# Allegro board LAY-96099_A.brd
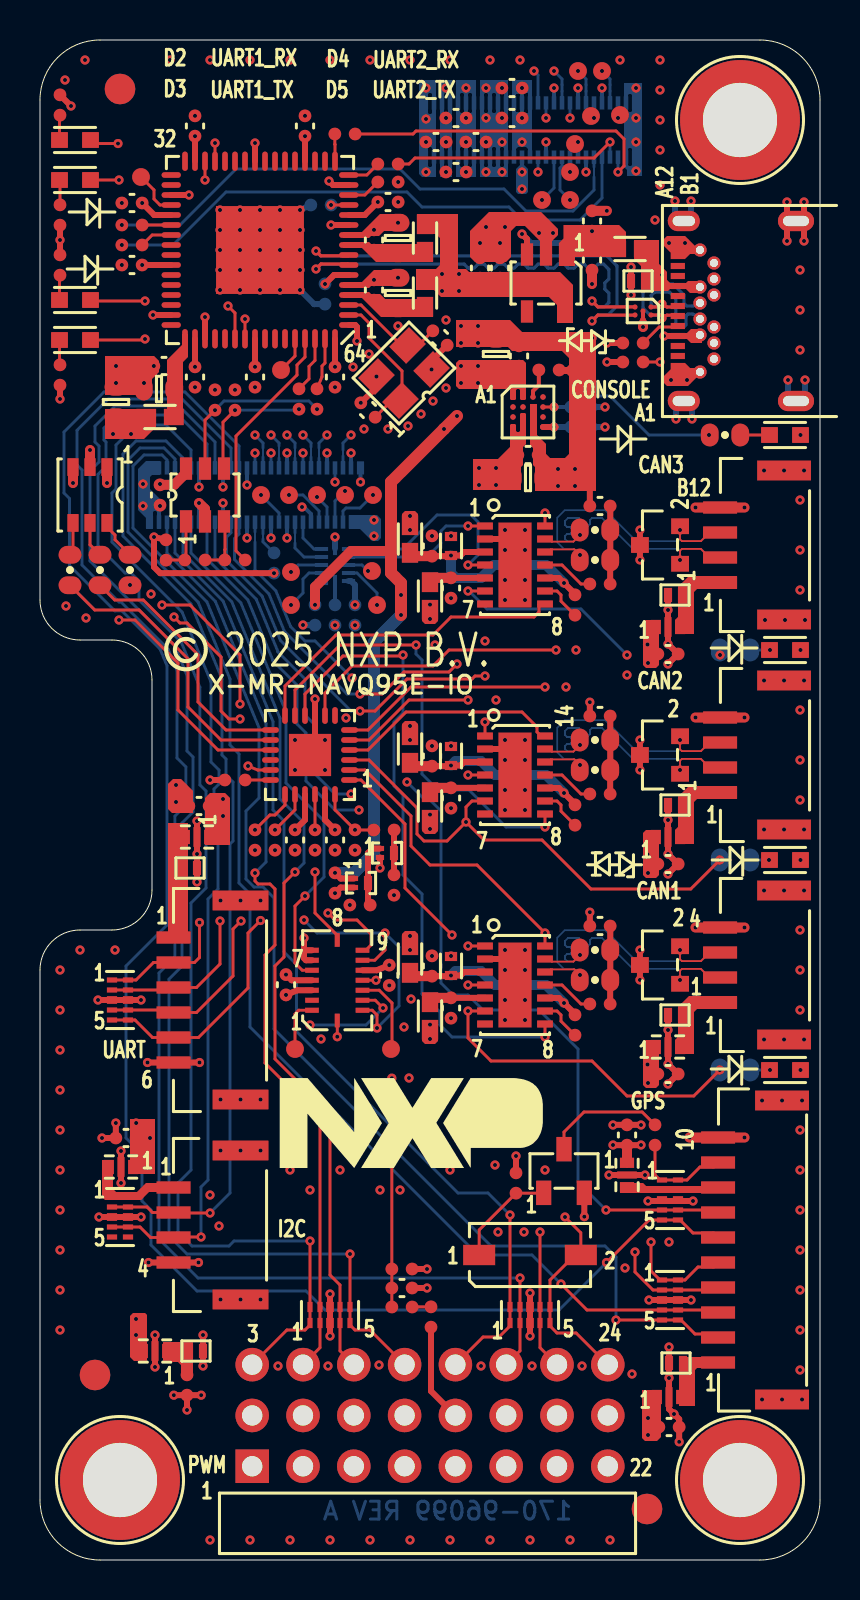
[diagram p0: board, top side]
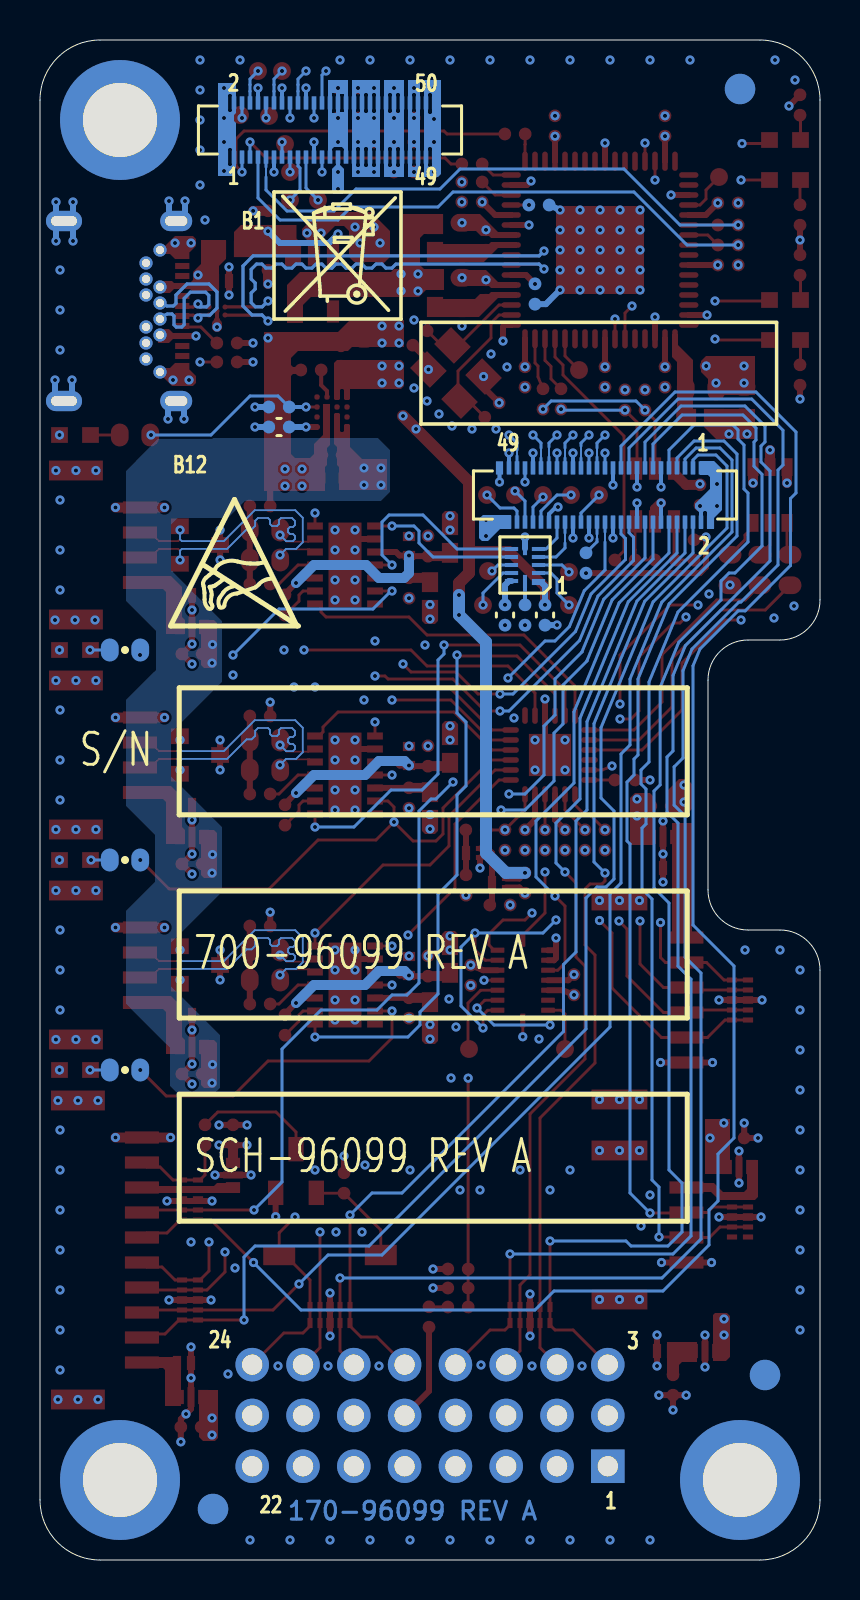
[diagram p1: board, bottom side, seen from below]

Outline 39 x 76 mm; copper layers: TOP, L2_GND1, L3_SIG1, L4_SIG2, L5_GND2, BOTTOM. Coordinates in mm from the lower left corner of the outline.
Outline path: 0,73 arc(0.88,75.12) 3,76 36,76 arc(38.12,75.12) 39,73 39,3 arc(38.12,0.88) 36,0 3,0 arc(0.88,0.88) 0,3 0,29.5 arc(0.59,30.91) 2,31.5 3.6,31.5 arc(5.01,32.09) 5.6,33.5 5.6,44 arc(5.01,45.41) 3.6,46 2,46 arc(0.59,46.59) 0,48 0,73

## Design rules (mm)
constraint set DEFAULT: min track width 0.145
net group CAN1_: nets CAN1_H CAN1_L
net group CAN2_: nets CAN2_H CAN2_L
net group CAN3_: nets CAN3_H CAN3_L
net group USB_CON_D: nets USB_CON_DM USB_CON_DP
net group USB_D: nets USB_DM USB_DP
net group CLK: nets CCM_CLKO2_FLEXIO1_IO27 CCM_CLKO3_CAN3_TX CCM_CLKO4_CAN3_RX DEBUG_TCLK_SWCLK EECLK GPIO15_SPI8_SCK SAI2_TX_BCLK
net group I2C: nets I2C4_SCL I2C4_SDA I3C1_SCL I3C1_SDA I3C2A_SCL I3C2A_SDA
net group POWER: nets CON_CAN1_5V0 CON_CAN2_5V0 CON_CAN3_5V0 FT_VPHY FT_VPLL N20053813 N20058865 N20059703 N20099573 N20163544 N20163589 VBUS VDD_CAN1_3V3 VDD_CAN1_5V0 VDD_CAN2_3V3 VDD_CAN2_5V0 VDD_CAN3_3V3 VDD_CAN3_5V0 VDD_CON_GPS_3V3 VDD_CON_GPS_5V0 VDD_CON_I2C_5V0 VDD_CON_UART_5V0 VDD_FT_1V8 VDD_SYS_1V8

## Placement (name value [footprint] x y rotation side)
BH1  MH3.7_6  [MH236-146P]  35 72 0 top
BH2  MH3.7_6  [MH236-146P]  35 4 0 top
BH3  MH3.7_6  [MH236-146P]  4 4 0 top
C1  0.047uF  [CC0402_25]  19.6 29.7 90 top
C2  0.047uF  [CC0402_25]  20.55 27.6 270 top
C4  1uF  [CC0402_TOL0P2]  20.55 29.7 90 top
C5  4700pF  [CC0402_25]  28 31.7 180 top
C6  0.047uF  [CC0402_25]  19.6 40.2 90 top
C7  0.047uF  [CC0402_25]  20.55 38.1 270 top
C9  1uF  [CC0402_TOL0P2]  20.55 40.2 90 top
C10  4700pF  [CC0402_25]  28 42.2 180 top
C11  0.047uF  [CC0402_25]  19.6 50.7 90 top
C12  0.047uF  [CC0402_25]  20.55 48.6 270 top
C14  1uF  [CC0402_TOL0P2]  20.55 50.7 90 top
C15  4700pF  [CC0402_25]  28 52.7 180 top
C16  0.1uF  [CC0402_25]  23.95 60.2 90 top
C17  1000pF  [CC0402_25]  27.05 56.65 0 bottom
C18  0.1uF  [CC0402_25]  17.46 29.24 270 top
C19  0.1uF  [CC0402_25]  12.3 28.76 90 top
C488  0.1uF  [CC0402_25]  16.7 63.5 90 top
C494  0.1uF  [CC0402_25]  27.6 65 270 top
C496  0.1uF  [CC0402_25]  23 64.6 90 top
C497  0.1uF  [CC0402_25]  7.75 59.15 270 top
C498  0.1uF  [CC0402_25]  4.6 64.75 180 top
C499  0.1uF  [CC0402_25]  10.75 59.15 270 top
C500  0.1uF  [CC0402_25]  13.25 71.7 90 top
C501  0.1uF  [CC0402_25]  6.2 59.7 180 top
C502  0.1uF  [CC0402_25]  17.4 67.9 0 top
C503  0.1uF  [CC0402_25]  14.75 59.15 270 top
C504  27pF  [CC0402_25]  16.4 57.5 135 top
C505  27pF  [CC0402_25]  20 61.1 315 top
C506  0.1uF  [CC0402_25]  7.75 71.7 90 top
C507  4.7uF  [CC0603_OV]  17.9 63.35 90 top
C508  4.7uF  [CC0603_OV]  17.9 66.1 90 top
C509  0.1uF  [CC0402_25]  16.7 66 90 top
C510  0.1uF  [CC0402_25]  4.6 67.85 180 top
C511  4.7uF  [CC0603_OV]  5.95 58.55 180 top
C512  4.7uF  [CC0603_OV]  3.8 57.9 90 top
C513  0.1uF  [CC0402_25]  6 53.25 270 top
C514  0.1uF  [CC0402_25]  12.75 36 270 top
C515  0.1uF  [CC0402_25]  14.75 36 270 top
C516  0.1uF  [CC0402_25]  31.45 6.65 0 top
C517  0.1uF  [CC0402_25]  29.35 21.25 90 top
C518  0.1uF  [CC0402_25]  7.95 37.7 180 top
C519  0.1uF  [CC0402_25]  4.3 21.1 180 top
C520  0.1uF  [CC0402_25]  31.4 45.3 0 top
C521  0.1uF  [CC0402_25]  31.4 34.8 0 top
C522  0.1uF  [CC0402_25]  31.4 24.3 0 top
C523  10uF  [CC0603_OV]  24.4 54.1 0 top
C524  0.1uF  [CC0402_25]  24.4 55.25 0 top
C526  10uF  [CC0603_OV]  22.8 60.3 90 top
C527  0.1uF  [CC0402_25]  19.8 70.9 180 top
C528  0.1uF  [CC0402_25]  23.6 72.1 0 top
C529  1uF  [CC0402_25]  22 64.6 90 top
C530  1uF  [CC0402_25]  27.6 66.95 90 top
C531  1uF  [CC0402_25]  20.8 69.4 0 top
C532  1uF  [CC0402_25]  21.8 70.9 180 top
C533  0.1uF  [CC0402_25]  20.8 72.1 0 top
C534  0.1uF  [CC0402_25]  23.6 73.6 0 top
C535  0.1uF  [CC0402_25]  15.75 47.25 270 bottom
C536  0.1uF  [CC0402_25]  13.75 47.25 270 bottom
C537  0.1uF  [CC0402_25]  18.1 13.6 0 top
D1  PESD5V0F1BL  [SOD882]  29.9 63.95 0 top
D2  LED_ORANGE  [LED_0603_11MIL]  1.75 71 0 top
D3  LED GREEN  [LED_0603]  1.75 69 0 top
D4  LED_ORANGE  [LED_0603_11MIL]  1.75 63 0 top
D5  LED GREEN  [LED_0603]  1.75 61 0 top
D7  ESD7104  [UDFN10_2P5X1]  31.5 13 0 top
D10  ESD7104  [UDFN10_2P5X1]  4 28 0 top
D26  PESD5V0F1BL  [SOD882]  31.8 9.85 0 top
D27  PESD5V0F1BL  [SOD882]  7.5 34.6 180 top
D31  PESD5V0F1BL  [SOD882]  7.8 10.45 180 top
D32  PESD5V0F1BL  [SOD882]  31.75 48.25 0 top
D33  PESD5V0F1BL  [SOD882]  31.75 37.75 0 top
D34  PESD5V0F1BL  [SOD882]  31.75 27.25 0 top
D35  ESD7104  [UDFN10_2P5X1]  14.5 12.25 90 top
D36  ESD7104  [UDFN10_2P5X1]  24.5 12.25 90 top
D37  ESD7104  [UDFN10_2P5X1]  31.5 18 0 top
D38  ESD7104  [UDFN10_2P5X1]  4 17.15 0 top
D39  LED_SUPER_RED  [LED_0603]  37.25 56.25 0 top
D41  LED_GRN  [LED_0603]  37.25 35 0 top
D42  LED_GRN  [LED_0603]  37.25 45.5 0 top
D43  LED_GRN  [LED_0603]  37.25 24.5 0 top
FL4  0.1uF  [CC_FIL_0402]  5.75 10.45 180 top
FL5  0.1uF  [CC_FIL_0402]  31.45 8.15 0 top
FL6  0.1uF  [CC_FIL_0402]  29.35 19.25 270 top
FL7  0.1uF  [CC_FIL_0402]  7.85 36.15 180 top
FL8  0.1uF  [CC_FIL_0402]  4.05 19.65 180 top
FL9  0.1uF  [CC_FIL_0402]  31.4 46.65 0 top
FL10  0.1uF  [CC_FIL_0402]  31.4 36.15 0 top
FL11  0.1uF  [CC_FIL_0402]  31.4 25.65 0 top
J1  CON 2X25  [CON_RCPT_2X25_0P4MM_SM]  24.5 71.5 180 bottom
J2  CON 2X25  [CON_RCPT_2X25_0P4MM_SM]  10.75 53.25 0 bottom
J4  CON_1X4  [CON_1X4_1P25_8P25X4P25_SM_RA]  36.25 29.75 90 top
J8  CON_1X4  [CON_1X4_1P25_8P25X4P25_SM_RA]  36.25 40.25 90 top
J9  CON_1X4  [CON_1X4_1P25_8P25X4P25_SM_RA]  36.25 50.75 90 top
J10  23K2 0101#LCP-872-2LF-L22-S22  [CON24_USB_TYPEC_RA_SMT_TH_2P2L]  33 65.5 90 top
J12  HDR_3X8_RA  [HDR_3X8_2P54_TH_RA]  10.61 4.69 90 top
J13  CON_1X4  [CON_1X4_1P25_8P25X4P25_SM]  9 16.75 90 top
J14  CON_1X6  [CON_1X6_1P25_10P75X4P25_SM]  9 28 90 top
J22  CON 1X10 SM  [CON10_1P25_15P75X4P05_SM]  35.75 15.5 90 top
L1  BLM18KG121TZ1  [IND_0603]  18.5 30.05 270 top
L2  BLM18KG121TZ1  [IND_0603]  19.5 27.2 90 top
L3  BLM18KG121TZ1  [IND_0603]  18.5 40.55 270 top
L4  BLM18KG121TZ1  [IND_0603]  19.5 37.7 90 top
L5  BLM18KG121TZ1  [IND_0603]  18.5 51.05 270 top
L6  BLM18KG121TZ1  [IND_0603]  19.5 48.2 90 top
L53  120OHM@100MHZ  [IND_0603]  29.5 65.55 180 top
L54  120OHM@100MHZ  [IND_0603]  19.25 63.35 270 top
L55  120OHM@100MHZ  [IND_0603]  19.25 66.1 270 top
L56  120OHM@100MHZ  [IND_0603]  6 57.15 0 top
NOREF  -  []  29.6 3.17 90 top
NOREF#2  -  []  34 48.88 90 top
NOREF#3  -  []  29.6 0.5 0 top
NOREF#4  -  []  29.75 62.25 90 top
NOREF#5  -  []  46.6 46.6 90 top
NOREF#6  -  []  1.65 51.85 0 top
NOREF#7  -  []  25.85 4.69 0 top
NOREF#8  -  []  25.3 47.45 90 top
NOREF#9  -  []  33.7 60.05 90 top
NOREF#10  -  []  28.35 61.85 90 top
NOREF#11  -  []  33.7 64.05 90 top
NOREF#12  -  []  30.62 27.56 0 top
NOREF#13  -  []  34 40.88 90 top
NOREF#14  -  []  34 51.38 90 top
NOREF#15  -  []  6.68 17.38 90 top
NOREF#16  -  []  -494.52 -243.34 0 top
NOREF#17  -  []  34 31.62 90 top
NOREF#18  -  []  23.65 56.65 0 top
NOREF#19  -  []  38.3 46.6 0 top
NOREF#20  -  []  5.65 10.81 0 top
NOREF#21  -  []  37.8 57.95 90 top
NOREF#22  -  []  14.86 26.98 90 top
NOREF#23  -  []  30.79 46.65 0 top
NOREF#24  -  []  21.65 16.65 0 top
NOREF#25  -  []  38.15 7.62 0 top
NOREF#26  -  []  17 35.12 90 top
NOREF#27  -  []  15.65 48.7 90 top
NOREF#28  -  []  16.41 31.29 90 top
NOREF#29  -  []  30.13 7.79 0 top
NOREF#30  -  []  7.24 36.15 0 top
NOREF#31  -  []  8.46 36.51 0 top
NOREF#32  -  []  37.2 36.52 90 top
NOREF#33  -  []  5.47 54.6 0 top
NOREF#34  -  []  37.2 47.02 90 top
NOREF#35  -  []  15.53 33.52 0 top
NOREF#36  -  []  37.86 72.9 0 top
NOREF#37  -  []  1.65 51.85 90 top
NOREF#38  -  []  6.68 24.88 0 top
NOREF#39  -  []  17.15 50.17 90 top
NOREF#40  -  []  25.15 56.65 90 top
NOREF#41  -  []  11.81 33.99 90 top
NOREF#42  -  []  25.25 47.8 90 top
NOREF#43  -  []  34 27.88 90 top
NOREF#44  -  []  7.69 9.12 90 top
NOREF#45  -  []  30.79 46.65 0 top
NOREF#46  -  []  34 38.38 0 top
NOREF#47  -  []  20.9 39.6 90 top
NOREF#48  -  []  25.25 39.25 90 top
NOREF#49  -  []  15.43 48.95 90 top
NOREF#50  -  []  12 19.6 0 top
NOREF#51  -  []  33.7 58.73 90 top
NOREF#52  -  []  6.68 14.88 90 top
NOREF#53  -  []  22.25 26.8 0 top
NOREF#54  -  []  22.25 47.8 0 top
NOREF#55  -  []  30.79 25.29 0 top
NOREF#56  -  []  37.1 8.03 90 top
NOREF#57  -  []  33.9 9.88 90 top
NOREF#58  -  []  30.79 35.79 0 top
NOREF#59  -  []  30.62 37.04 90 top
NOREF#60  -  []  4.05 19.65 0 top
NOREF#61  -  []  19.45 12.6 90 top
NOREF#62  -  []  31.45 9.85 0 top
NOREF#63  -  [unnamed#2]  2.75 9.25 0 top
NOREF#64  -  []  6.35 54.6 0 top
NOREF#65  -  []  37.86 4.9 0 top
NOREF#66  -  []  34 52.62 90 top
NOREF#67  -  []  2.17 56.8 0 top
NOREF#68  -  []  16.82 35.02 90 top
NOREF#69  -  []  31.89 59.7 90 top
NOREF#70  -  []  34 27.88 0 top
NOREF#71  -  []  5.14 10.45 0 top
NOREF#72  -  []  20.55 39.73 90 top
NOREF#73  -  []  6.68 18.62 90 top
NOREF#74  -  []  30.62 38.06 0 top
NOREF#75  -  []  38.3 36.1 0 top
NOREF#76  -  []  7.3 45.5 0 top
NOREF#77  -  []  37.2 26.02 90 top
NOREF#78  -  []  29.55 63.95 0 top
NOREF#79  -  []  29.35 18.64 90 top
NOREF#80  -  []  11.15 12.6 0 top
NOREF#81  -  []  7.39 34.29 0 top
NOREF#82  -  []  31.91 10.16 90 top
NOREF#83  -  []  19.23 70.14 90 top
NOREF#84  -  [unnamed#2]  4 73.55 0 top
NOREF#85  -  []  21.96 15.25 0 top
NOREF#86  -  []  34 48.88 0 top
NOREF#87  -  []  14.75 38.27 90 top
NOREF#88  -  []  29.54 62.86 0 top
NOREF#89  -  []  30.79 25.65 0 top
NOREF#90  -  []  20.9 50.1 90 top
NOREF#91  -  []  5.75 10.45 0 top
NOREF#92  -  []  33.7 58.73 90 top
NOREF#93  -  []  27.35 13.85 90 top
NOREF#94  -  []  3.24 2.25 0 top
NOREF#95  -  []  7.69 10.14 0 top
NOREF#96  -  []  10.61 9.77 0 top
NOREF#97  -  []  19.7 70.14 0 top
NOREF#98  -  []  51.8 57.35 90 top
NOREF#99  -  []  7.85 36.15 0 top
NOREF#100  -  []  30.9 70.47 0 top
NOREF#101  -  []  31.89 64.7 90 top
NOREF#102  -  []  30.79 36.15 0 top
NOREF#103  -  []  31.29 10.16 0 top
NOREF#104  -  []  29.39 63.64 0 top
NOREF#105  -  []  16.82 35.02 0 top
NOREF#106  -  []  13.85 50.8 0 top
NOREF#107  -  []  13.6 30.49 0 top
NOREF#108  -  []  1.08 51.62 0 top
NOREF#109  -  []  23.29 56.28 0 top
NOREF#110  -  []  6.68 14.88 0 top
NOREF#111  -  []  22.25 37.3 0 top
NOREF#112  -  []  22.2 36.95 0 top
NOREF#113  -  []  25.52 56.28 90 top
NOREF#114  -  []  7.45 10.45 0 top
NOREF#115  -  []  6.68 31.12 90 top
NOREF#116  -  []  30.79 36.15 0 top
NOREF#117  -  []  20.2 30.3 0 top
NOREF#118  -  []  -72.88 -48.4 0 top
NOREF#119  -  []  5.95 54.6 0 top
NOREF#120  -  []  25.25 26.8 90 top
NOREF#121  -  []  6.68 29.88 90 top
NOREF#122  -  []  20.9 29.1 90 top
NOREF#123  -  []  13.6 27.49 90 top
NOREF#124  -  []  25.25 49.75 90 top
NOREF#125  -  []  34 38.38 90 top
NOREF#126  -  []  41.6 57.35 0 top
NOREF#127  -  []  11.15 22.6 0 top
NOREF#128  -  []  34.54 0 90 top
NOREF#129  -  []  31.4 37.75 0 top
NOREF#130  -  []  10.61 9.77 0 top
NOREF#131  -  []  1.08 51.62 90 top
NOREF#132  -  []  15.7 33.62 90 top
NOREF#133  -  []  32.19 57.95 0 top
NOREF#134  -  []  29.35 19.25 90 top
NOREF#135  -  []  15.55 42.3 90 top
NOREF#136  -  []  46.6 25.6 90 top
NOREF#137  -  []  3.44 19.65 0 top
NOREF#138  -  []  30.15 62.45 90 top
NOREF#139  -  []  6.86 4.9 0 top
NOREF#140  -  []  6.68 24.88 90 top
NOREF#141  -  []  4.35 50.17 0 top
NOREF#142  -  []  7.39 33.27 90 top
NOREF#143  -  []  31.4 27.25 0 top
NOREF#144  -  []  31.4 48.25 0 top
NOREF#145  -  []  28.5 70.14 0 top
NOREF#146  -  []  20.55 50.23 90 top
NOREF#147  -  []  38.1 59.83 90 top
NOREF#148  -  []  29.39 63.64 90 top
NOREF#149  -  []  30.84 8.15 0 top
NOREF#150  -  []  10.03 23.02 90 top
NOREF#151  -  []  14.07 50.55 0 top
NOREF#152  -  []  21.95 22.6 90 top
NOREF#153  -  []  33 59.4 90 top
NOREF#154  -  []  20.2 40.8 0 top
NOREF#155  -  []  30.79 46.29 0 top
NOREF#156  -  []  25.3 36.95 90 top
NOREF#157  -  []  34 42.12 90 top
NOREF#158  -  []  15.55 38.2 0 top
NOREF#159  -  []  20.14 0.5 0 top
NOREF#160  -  []  30.62 26.54 90 top
NOREF#161  -  []  20.2 51.3 0 top
NOREF#162  -  []  25.15 56.65 90 top
NOREF#163  -  [unnamed#2]  30.35 2.55 0 top
NOREF#164  -  []  22.2 26.45 0 top
NOREF#165  -  []  25.3 26.45 90 top
NOREF#166  -  []  17 35.12 0 top
NOREF#167  -  []  25.85 7.23 90 top
NOREF#168  -  []  33.7 58.73 90 top
NOREF#169  -  []  22.2 47.45 0 top
NOREF#170  -  []  15.7 33.62 0 top
NOREF#171  -  []  23.65 56.65 0 top
NOREF#172  -  []  30.62 48.56 0 top
NOREF#173  -  []  34 30.38 90 top
NOREF#174  -  []  30.62 47.54 90 top
NOREF#175  -  []  30.84 8.15 0 top
NOREF#176  -  []  4.66 19.29 90 top
NOREF#177  -  []  15.53 33.52 90 top
NOREF#178  -  []  10.03 13.03 90 top
NOREF#179  -  []  28.99 19.86 90 top
NOREF#180  -  []  0 70.31 0 top
NOREF#181  -  []  15.43 48.95 90 top
NOREF#182  -  []  38.3 25.6 0 top
NOREF#183  -  []  14.25 42.23 0 top
NOREF#184  -  []  25.25 37.3 90 top
NOREF#185  -  []  20.55 29.23 90 top
NOREF#186  -  []  43.7 70.47 90 top
NOREF#187  -  []  46.6 36.1 90 top
NOREF#188  -  []  13.6 30.49 0 top
NOREF#189  -  []  12.25 42.23 0 top
NOREF#190  -  []  30.79 25.65 0 top
NOREF#191  -  []  38.15 7.62 90 top
NOREF#192  -  []  25.25 28.75 90 top
NOREF#193  -  []  29.54 62.86 90 top
NOREF#194  -  []  16.02 51.9 90 top
NOREF#195  -  []  19.23 70.14 0 top
NOREF#196  -  []  7.15 34.6 0 top
NOREF#197  -  []  32.04 16.94 180 bottom
NOREF#198  -  []  32.04 27.1 180 bottom
NOREF#199  -  []  27.3 62.05 180 bottom
NOREF#200  -  []  32.45 46.7 180 bottom
NOREF#201  -  [unnamed#2]  2.75 9.25 180 bottom
NOREF#202  -  []  32.04 37.26 180 bottom
NOREF#203  -  []  19.95 56.8 180 bottom
NOREF#204  -  [unnamed#2]  4 73.55 180 bottom
NOREF#205  -  [unnamed#2]  30.35 2.55 180 bottom
Q1  BSH103  [SOT23]  26.2 19.45 0 top
Q3  NX5008NBKMYL  [DFN10106B]  16.05 33.85 0 top
Q4  NX5008NBKMYL  [DFN10106B]  17.35 35.35 0 top
R1  10K  [RC0402_25]  26.75 26.75 270 top
R3  60.4  [RC0603_OV]  27.75 30.5 0 top
R4  60.4  [RC0603_OV]  27.75 29 0 top
R5  0 OHM  [RC0402_25]  28 27.8 0 top
R6  10K  [RC0402_25]  26.75 37.25 270 top
R7  60.4  [RC0603_OV]  27.75 39.5 0 top
R8  0 OHM  [RC0402_25]  28 38.3 0 top
R9  60.4  [RC0603_OV]  27.75 41 0 top
R10  10K  [RC0402_25]  26.75 47.75 270 top
R11  60.4  [RC0603_OV]  27.75 50 0 top
R12  0 OHM  [RC0402_25]  28 48.8 0 top
R13  60.4  [RC0603_OV]  27.75 51.5 0 top
R14  10K  [RC0402_25]  27.05 57.65 0 bottom
R16  0 OHM  [RC0402_25]  14.05 67.75 180 bottom
R17  10K  [RC0402_25]  17.4 68.9 180 top
R20  12K  [RC0402_25]  14.25 63.3 270 bottom
R21  5.1K  [RC0402_25]  29.65 60.85 180 top
R22  5.1K  [RC0402_25]  29.65 59.9 180 top
R23  0 OHM  [RC0402_25]  9.75 50 0 top
R24  0 OHM  [RC0402_25]  12.95 58.05 90 top
R25  0 OHM  [RC0402_25]  13.85 58.05 90 top
R26  10K  [RC0402_25]  6.3 50.5 270 top
R27  2.2K  [RC0402_25]  7.75 50 0 top
R28  10K  [RC0402_25]  9.75 58 270 top
R29  10K  [RC0402_25]  8.75 58 270 top
R30  1.00k  [RC0402_25]  1 72.75 270 top
R31  1.00k  [RC0402_25]  1 67.25 90 top
R32  1.00k  [RC0402_25]  1 64.75 270 top
R33  1.00k  [RC0402_25]  1 59.25 90 top
R34  0 OHM  [RC0402_25]  9.75 39 180 top
R35  10K  [RC0402_25]  13.75 36 90 top
R36  10K  [RC0402_25]  15.75 36 90 top
R38  2.2K  [RC0402_25]  11.75 36 90 top
R39  2.2K  [RC0402_25]  10.75 36 90 top
R40  0 OHM  [RC0402_25]  30.75 21.25 270 top
R41  10K  [RC0402_25]  23.8 18.85 90 top
R43  51K  [RC0402_25]  25.45 59.5 0 top
R45  10K  [RC0402_25]  14.75 33.85 270 top
R46  10K  [RC0402_25]  17.7 33.75 90 top
R47  10K  [RC0402_25]  16 32.75 0 top
R48  0 OHM  [RC0402_25]  17.2 36.5 180 top
R49  390  [RC0603_OV]  34.25 56.25 0 top
R50  0 OHM  [RC0402_25]  7.35 8.75 90 top
R51  0 OHM  [RC0402_25]  19.55 12.15 90 top
R52  390  [RC0603_OV]  34.75 35 0 bottom
R53  390  [RC0603_OV]  34.75 45.5 0 bottom
R54  390  [RC0603_OV]  34.75 24.5 0 bottom
R55  10K  [RC0402_25]  14.75 47.25 270 bottom
R56  1K  [RC0402_25]  18.1 14.55 0 top
R57  3K  [RC0402_25]  18.1 12.65 180 top
R58  0 OHM  [RC0402_25]  17.4 69.8 0 top
R59  0 OHM  [RC0402_25]  15.25 71.3 0 top
R60  0 OHM  [RC0402_25]  4.6 66.75 180 top
R61  0 OHM  [RC0402_25]  4.6 65.75 180 top
R62  390  [RC0603_OV]  4.5 49.5 90 top
R63  390  [RC0603_OV]  3 49.5 90 top
R64  390  [RC0603_OV]  1.5 49.5 90 top
R65  0 OHM  [RC0402_25]  11.7 49.85 90 bottom
S1  CHS-01TA1  [SW_2P8X5P7_SM]  24.5 15.25 90 top
TP245  TP_35MIL  [TESTPOINT_35MIL]  12.55 49.4 270 top
TP251  TP_35MIL  [TESTPOINT_35MIL]  12.05 59.5 180 top
TP252  TP_35MIL  [TESTPOINT_35MIL]  5.05 69.15 180 top
TP253  TP_35MIL  [TESTPOINT_35MIL]  12.55 47.75 270 top
TP254  TP_35MIL  [TESTPOINT_35MIL]  16.85 47.75 270 top
TP255  TP_35MIL  [TESTPOINT_35MIL]  16.6 49.45 270 top
TP256  TP_35MIL  [TESTPOINT_35MIL]  29 72.25 90 top
TP257  TP_35MIL  [TESTPOINT_35MIL]  28.1 74.45 90 top
TP258  TP_35MIL  [TESTPOINT_35MIL]  27.55 72.2 90 top
TP259  TP_35MIL  [TESTPOINT_35MIL]  26.9 74.45 90 top
TP260  TP_35MIL  [TESTPOINT_35MIL]  25.1 68 90 top
TP261  TP_35MIL  [TESTPOINT_35MIL]  26.5 68 90 top
TP262  TP_35MIL  [TESTPOINT_35MIL]  26.5 69.4 90 top
TP263  TP_35MIL  [TESTPOINT_35MIL]  26.75 70.8 90 top
TP264  TP_35MIL  [TESTPOINT_35MIL]  11.05 53.25 90 top
TP265  TP_35MIL  [TESTPOINT_35MIL]  12.45 53.25 90 top
TP266  TP_35MIL  [TESTPOINT_35MIL]  13.85 53.25 90 top
TP267  TP_35MIL  [TESTPOINT_35MIL]  15.25 53.25 90 top
TP268  TP_35MIL  [TESTPOINT_35MIL]  16.65 53.25 90 top
TP269  TP_35MIL  [TESTPOINT_35MIL]  12.75 25.55 0 top
TP270  TP_35MIL  [TESTPOINT_35MIL]  17.55 25.55 0 top
U3  TJA1463ATK  [HVSON14_0P65_4P6X3P1_EP]  23.75 28.75 0 top
U6  PESD2CANFD24L-TR  [SOT23_A]  31 29.75 90 top
U11  NX5P3363UKZ  [BGA16_0P5_2P23X2P23]  24.4 57.4 0 top
U12  TJA1463ATK  [HVSON14_0P65_4P6X3P1_EP]  23.75 39.25 0 top
U13  PESD2CANFD24L-TR  [SOT23_A]  31 40.25 90 top
U14  TJA1463ATK  [HVSON14_0P65_4P6X3P1_EP]  23.75 49.75 0 top
U15  PESD2CANFD24L-TR  [SOT23_A]  31 50.75 90 top
U16  FT2232HQ  [QFN64_0P5_9X9_EP173]  11 65.5 180 top
U17  BMI088  [LGA16_0P5_3X4P5MM]  14.86 28.99 180 top
U18  TLV75533PDBVR  [SOT23-5]  25.3 63.85 180 top
U19  93LC66B  [SOT23-6]  8.25 53.25 0 top
U20  PCMF1USB3S  [WLCSP5_0P4_0P82X1P22]  30.15 62.45 270 top
U21  PCAL6416AHF  [QFN24_4X4_EP2P1MM]  13.5 40.25 90 top
U22  74AVC4T3144GU12-QX  [XQFN12_0P4_1P8X2P1]  14.75 49.75 0 bottom
U23  150352M173300  [LED6_0P85_3P25X2P85_SM]  2.5 53.25 270 top
Y1  12 MHz  [XTAL_4_3P3X2P6MM]  18.2 59.35 45 top

## Library data of the parts
BH1-BH3 = MOUNT_HOLE
C1 C2 C4-C7 C9-C12 C14-C19 C504 C505 C507 C508 C511 C512 C514-C524 C526-C537 = CAP_NP
C488 C494 C496-C503 C506 C509 C510 C513 = CAP_NP: tolerance: 10%
D1 D26 D27 D31-D34 = DIODE_BIDIR
D2-D5 D39 D41-D43 = LED
D7 D10 D35-D38 = ESD7104M
FL4-FL11 = EMIFILTER_NFM21P
J1 J2 = HDR_2X25_4S
J4 J8 J9 J13 = CONN_1x4_SHLD
J10 = USB24_TYPEC_SH4
J12 = HDR-3X8
J14 = CONN_1x6_SHLD
J22 = CON_HDR_1X10_2SH
L1-L6 = IND_FERRITE
L53-L56 = BEAD_0
Q1 = MOSFET_N
Q3 Q4 = NMOS_2N7002BKW_3P
R1 R3-R14 R16 R17 R20-R36 R38-R41 R43 R45-R65 = RES
S1 = SW-SPST
TP245 TP251-TP270 = T POINT R: Tolerance: TOLERANCE; User Part Number: 510-75618
U3 U12 U14 = TJA1043ATK_14P_EP
U6 U13 U15 = ESD_DIODE_2LINE
U11 = NX5P3290_16P
U16 = FT2232H_QFN_64P
U17 = BMI088_16P
U18 = TLV733_SOT23_5P
U19 = 93AA56BT_SOT23-6
U20 = PESD1USB30_5P_A
U21 = PCAL6416AHF_QFN24
U22 = 74AVC4T3144_12P
U23 = LED_RGB_6P
Y1 = XTAL_13

## Footprints (pads in the part's own frame, mm; a bottom-side part is the same pattern mirrored in y, then rotated)
BGA16_0P5_2P23X2P23
  round 0.28 smd: A1(-0.75,0.75) A2(-0.25,0.75) A3(0.25,0.75) A4(0.75,0.75) B1(-0.75,0.25) B2(-0.25,0.25) B3(0.25,0.25) B4(0.75,0.25) C1(-0.75,-0.25) C2(-0.25,-0.25) C3(0.25,-0.25) C4(0.75,-0.25) D1(-0.75,-0.75) D2(-0.25,-0.75) D3(0.25,-0.75) D4(0.75,-0.75)
CC0402_25
  round 0.635 smd: 1(-0.508,0) 2(0.508,0)
CC0402_TOL0P2
  rect 0.457x0.61 smd: 1(-0.475,0) 2(0.475,0)
CC0603_OV
  oval 0.889x1.143 smd: 1(-0.762,0) 2(0.762,0)
CC_FIL_0402
  rect 0.508x0.711 smd: 1(-0.61,0) 3(0.61,0)
  rect 0.356x0.991 smd: 2(0,0)
CON10_1P25_15P75X4P05_SM
  rect 0.61x1.702 smd: 1(-5.625,1.848) 2(-4.375,1.848) 3(-3.125,1.848) 4(-1.875,1.848) 5(-0.625,1.848) 6(0.625,1.848) 7(1.875,1.848) 8(3.125,1.848) 9(4.375,1.848) 10(5.625,1.848)
  rect 0.991x2.692 smd: S1(-7.475,-1.352) S2(7.475,-1.352)
CON24_USB_TYPEC_RA_SMT_TH_2P2L
  round 0 hole 0.66 unplated: (-6.775,-0.7) (0.675,-0.7)
  rect 0.305x0.711 smd: A1(-5.8,1.11) A2(-5.3,1.11) A3(-4.8,1.11) A4(-4.3,1.11) A5(-3.8,1.11) A6(-3.3,1.11) A7(-2.8,1.11) A8(-2.3,1.11) A9(-1.8,1.11) A10(-1.3,1.11) A11(-0.8,1.11) A12(-0.3,1.11)
  round 0.66 hole 0.406: B1(0,0) B2(-0.65,-0.7) B3(-1.45,-0.7) B4(-1.85,0) B5(-2.25,-0.7) B6(-2.65,0) B7(-3.45,0) B8(-3.85,-0.7) B9(-4.25,0) B10(-4.65,-0.7) B11(-5.45,-0.7) B12(-6.1,0)
  oval 1.016x1.6 hole 0.508x1.118: SH1(-7.55,0.81) SH2(1.45,0.81)
  oval 1.016x1.803 hole 0.508x1.295: SH3(-7.55,-4.8) SH4(1.45,-4.8)
CON_1X4_1P25_8P25X4P25_SM
  rect 0.61x1.702 smd: 1(1.875,2.322) 2(0.625,2.322) 3(-0.625,2.322) 4(-1.875,2.322)
  rect 0.991x2.794 smd: SH1(-3.725,-1.028) SH2(3.725,-1.028)
CON_1X4_1P25_8P25X4P25_SM_RA
  rect 0.61x1.702 smd: 1(-1.875,2.247) 2(-0.625,2.247) 3(0.625,2.247) 4(1.875,2.247)
  rect 0.991x2.692 smd: SH1(-3.725,-0.953) SH2(3.725,-0.953)
CON_1X6_1P25_10P75X4P25_SM
  rect 0.61x1.702 smd: 1(3.125,2.322) 2(1.875,2.322) 3(0.625,2.322) 4(-0.625,2.322) 5(-1.875,2.322) 6(-3.125,2.322)
  rect 0.991x2.794 smd: SH1(-4.975,-1.028) SH2(4.975,-1.028)
CON_RCPT_2X25_0P4MM_SM
  rect 0.229x0.66 smd: 1(-4.8,-1.355) 2(-4.8,1.355) 3(-4.4,-1.355) 4(-4.4,1.355) 5(-4,-1.355) 6(-4,1.355) 7(-3.6,-1.355) 8(-3.6,1.355) 9(-3.2,-1.355) 10(-3.2,1.355) 11(-2.8,-1.355) 12(-2.8,1.355) 13(-2.4,-1.355) 14(-2.4,1.355) 15(-2,-1.355) 16(-2,1.355) 17(-1.6,-1.355) 18(-1.6,1.355) 19(-1.2,-1.355) 20(-1.2,1.355) 21(-0.8,-1.355) 22(-0.8,1.355) 23(-0.4,-1.355) 24(-0.4,1.355) 25(0,-1.355) 26(0,1.355) 27(0.4,-1.355) 28(0.4,1.355) 29(0.8,-1.355) 30(0.8,1.355) 31(1.2,-1.355) 32(1.2,1.355) 33(1.6,-1.355) 34(1.6,1.355) 35(2,-1.355) 36(2,1.355) 37(2.4,-1.355) 38(2.4,1.355) 39(2.8,-1.355) 40(2.8,1.355) 41(3.2,-1.355) 42(3.2,1.355) 43(3.6,-1.355) 44(3.6,1.355) 45(4,-1.355) 46(4,1.355) 47(4.4,-1.355) 48(4.4,1.355) 49(4.8,-1.355) 50(4.8,1.355)
  rect 0.356x0.66 smd: SH1(-5.275,1.355) SH2(-5.275,-1.355) SH3(5.275,-1.355) SH4(5.275,1.355)
DFN10106B
  rect 0.406x0.254 smd: 1(-0.35,0.225) 2(-0.35,-0.225)
  rect 0.406x0.711 smd: 3(0.35,0)
HDR_3X8_2P54_TH_RA
  rect 1.676x1.676 hole 1.016: 1(0,0)
  round 1.676 hole 1.016: 2(2.54,0) 3(5.08,0) 4(0,-2.54) 5(2.54,-2.54) 6(5.08,-2.54) 7(0,-5.08) 8(2.54,-5.08) 9(5.08,-5.08) 10(0,-7.62) 11(2.54,-7.62) 12(5.08,-7.62) 13(0,-10.16) 14(2.54,-10.16) 15(5.08,-10.16) 16(0,-12.7) 17(2.54,-12.7) 18(5.08,-12.7) 19(0,-15.24) 20(2.54,-15.24) 21(5.08,-15.24) 22(0,-17.78) 23(2.54,-17.78) 24(5.08,-17.78)
HVSON14_0P65_4P6X3P1_EP
  rect 0.787x0.356 smd: 1(-1.5,1.95) 2(-1.5,1.3) 3(-1.5,0.65) 4(-1.5,0) 5(-1.5,-0.65) 6(-1.5,-1.3) 7(-1.5,-1.95) 8(1.5,-1.95) 9(1.5,-1.3) 10(1.5,-0.65) 11(1.5,0) 12(1.5,0.65) 13(1.5,1.3) 14(1.5,1.95)
  rect 1.651x4.242 smd: 15(0,0)
IND_0603
  rect 0.991x0.813 smd: 1(-0.69,0) 2(0.69,0)
LED6_0P85_3P25X2P85_SM
  rect 0.889x0.559 smd: 1(-1.395,0.85) 2(1.395,0.85) 3(-1.395,0) 4(1.395,0) 5(-1.395,-0.85) 6(1.395,-0.85)
LED_0603
  rect 0.838x0.787 smd: A(-0.775,0) C(0.775,0)
LED_0603_11MIL
  rect 0.838x0.787 smd: A(-0.775,0) C(0.775,0)
LGA16_0P5_3X4P5MM
  rect 0.686x0.254 smd: 1(1.262,1.5) 2(1.262,1) 3(1.262,0.5) 4(1.262,0) 5(1.262,-0.5) 6(1.262,-1) 7(1.262,-1.5) 9(-1.262,-1.5) 10(-1.262,-1) 11(-1.262,-0.5) 12(-1.262,0) 13(-1.262,0.5) 14(-1.262,1) 15(-1.262,1.5)
  rect 0.254x0.686 smd: 8(0,-2.013) 16(0,2.013)
MH236-146P
  round 5.994 hole 3.708: 1(0,0)
QFN24_4X4_EP2P1MM
  oval 0.279x0.838 smd: 1(-1.25,-1.975) 2(-0.75,-1.975) 3(-0.25,-1.975) 4(0.25,-1.975) 5(0.75,-1.975) 6(1.25,-1.975) 13(1.25,1.975) 14(0.75,1.975) 15(0.25,1.975) 16(-0.25,1.975) 17(-0.75,1.975) 18(-1.25,1.975)
  oval 0.838x0.279 smd: 7(1.975,-1.25) 8(1.975,-0.75) 9(1.975,-0.25) 10(1.975,0.25) 11(1.975,0.75) 12(1.975,1.25) 19(-1.975,1.25) 20(-1.975,0.75) 21(-1.975,0.25) 22(-1.975,-0.25) 23(-1.975,-0.75) 24(-1.975,-1.25)
  rect 2.108x2.108 smd: 25(0,0)
QFN64_0P5_9X9_EP173
  oval 0.965x0.279 smd: 1(-4.438,3.75) 2(-4.438,3.25) 3(-4.438,2.75) 4(-4.438,2.25) 5(-4.438,1.75) 6(-4.438,1.25) 7(-4.438,0.75) 8(-4.438,0.25) 9(-4.438,-0.25) 10(-4.438,-0.75) 11(-4.438,-1.25) 12(-4.438,-1.75) 13(-4.438,-2.25) 14(-4.438,-2.75) 15(-4.438,-3.25) 16(-4.438,-3.75) 33(4.438,-3.75) 34(4.438,-3.25) 35(4.438,-2.75) 36(4.438,-2.25) 37(4.438,-1.75) 38(4.438,-1.25) 39(4.438,-0.75) 40(4.438,-0.25) 41(4.438,0.25) 42(4.438,0.75) 43(4.438,1.25) 44(4.438,1.75) 45(4.438,2.25) 46(4.438,2.75) 47(4.438,3.25) 48(4.438,3.75)
  oval 0.279x0.965 smd: 17(-3.75,-4.438) 18(-3.25,-4.438) 19(-2.75,-4.438) 20(-2.25,-4.438) 21(-1.75,-4.438) 22(-1.25,-4.438) 23(-0.75,-4.438) 24(-0.25,-4.438) 25(0.25,-4.438) 26(0.75,-4.438) 27(1.25,-4.438) 28(1.75,-4.438) 29(2.25,-4.438) 30(2.75,-4.438) 31(3.25,-4.438) 32(3.75,-4.438) 49(3.75,4.438) 50(3.25,4.438) 51(2.75,4.438) 52(2.25,4.438) 53(1.75,4.438) 54(1.25,4.438) 55(0.75,4.438) 56(0.25,4.438) 57(-0.25,4.438) 58(-0.75,4.438) 59(-1.25,4.438) 60(-1.75,4.438) 61(-2.25,4.438) 62(-2.75,4.438) 63(-3.25,4.438) 64(-3.75,4.438)
  rect 4.394x4.394 smd: 65(0,0)
RC0402_25
  round 0.635 smd: 1(-0.508,0) 2(0.508,0)
RC0603_OV
  oval 0.889x1.143 smd: 1(-0.762,0) 2(0.762,0)
SOD882
  rect 0.406x0.711 smd: 1(-0.35,0) 2(0.35,0)
SOT23
  rect 0.762x1.219 smd: 1(-1.016,-1.092) 2(1.016,-1.092) 3(0,1.092)
SOT23-5
  rect 0.61x1.118 smd: 1(-0.95,-1.425) 2(0,-1.425) 3(0.95,-1.425) 4(0.95,1.425) 5(-0.95,1.425)
SOT23-6
  rect 0.61x1.118 smd: 1(-0.95,-1.321) 2(0,-1.321) 3(0.95,-1.321) 4(0.95,1.321) 5(0,1.321) 6(-0.95,1.321)
SOT23_A
  rect 0.787x0.889 smd: 1(-0.94,-1.003) 2(0.94,-1.003) 3(0,1.003)
SW_2P8X5P7_SM
  rect 1.016x1.6 smd: 1(0,2.54) 2(0,-2.54)
TESTPOINT_35MIL
  round 0.889 smd: 1(0,0)
UDFN10_2P5X1
  rect 0.508x0.254 smd: 1(-0.4,1) 2(-0.4,0.5) 4(-0.4,-0.5) 5(-0.4,-1) 6(0.4,-1) 7(0.4,-0.5) 9(0.4,0.5) 10(0.4,1)
  rect 0.508x0.381 smd: 3(-0.4,0) 8(0.4,0)
unnamed#2
  round 1.524 smd: (0,0)
WLCSP5_0P4_0P82X1P22
  round 0.254 smd: A1(-0.2,0.4) A2(0.2,0.4) B1(0,0) C1(-0.2,-0.4) C2(0.2,-0.4)
XQFN12_0P4_1P8X2P1
  rect 0.66x0.305 smd: 1(-0.675,0.85)
  rect 0.66x0.203 smd: 2(-0.675,0.4) 3(-0.675,0) 4(-0.675,-0.4) 5(-0.675,-0.8) 7(0.675,-0.8) 8(0.675,-0.4) 9(0.675,0) 10(0.675,0.4) 11(0.675,0.8)
  rect 0.203x0.66 smd: 6(0,-0.825) 12(0,0.825)
XTAL_4_3P3X2P6MM
  rect 1.397x1.194 smd: 1(-1.1,-0.85) 2(1.1,-0.85) 3(1.1,0.85) 4(-1.1,0.85)

## Nets
GND: BH1.1 BH2.1 BH3.1 C1.2 C2.2 C4.2 C5.2 C6.2 C7.2 C9.2 C10.2 C11.2 C12.2 C14.2 C15.2 C16.2 C17.2 C18.2 C19.2 C488.2 C494.2 C496.2 C497.2 C498.2 C499.2 C500.2 C501.2 C502.2 C503.2 C504.2 C505.2 C506.2 C507.2 C508.2 C509.2 C510.2 C511.2 C512.2 C513.2 C514.2 C515.2 C516.2 C517.2 C518.2 C519.2 C520.2 C521.2 C522.2 C523.2 C524.2 C526.2 C527.2 C528.2 C529.2 C530.2 C531.2 C532.2 C533.2 C534.2 C535.2 C536.2 C537.2 D1.1 D7.3 D7.8 D10.3 D10.8 D26.1 D27.1 D31.1 D32.1 D33.1 D34.1 D35.3 D35.8 D36.3 D36.8 D37.3 D37.8 D38.3 D38.8 D39.C(CATHODE) D41.C(CATHODE) D42.C(CATHODE) D43.C(CATHODE) FL4.2 FL5.2 FL6.2 FL7.2 FL8.2 FL9.2 FL10.2 FL11.2 J1.1 J1.2 J1.8 J1.11 J1.14 J1.20 J1.21 J1.25 J1.26 J1.28 J1.29 J1.30 J1.39 J1.40 J1.41 J1.42 J1.43 J1.44 J1.49 J1.50 J1.SH1 J1.SH2 J1.SH3 J1.SH4 J2.1 J2.2 J2.11 J2.12 J2.17 J2.18 J2.23 J2.24 J2.30 J2.33 J2.34 J2.40 J2.43 J2.49 J2.50 J2.SH1 J2.SH2 J2.SH3 J2.SH4 J4.4 J4.SH1 J4.SH2 J8.4 J8.SH1 J8.SH2 J9.4 J9.SH1 J9.SH2 J10.A1 J10.A12 J10.B1 J10.B12 J10.SH1 J10.SH2 J10.SH3 J10.SH4 J12.1 J12.4 J12.7 J12.10 J12.13 J12.16 J12.19 J12.22 J13.4 J13.SH1 J13.SH2 J14.6 J14.SH1 J14.SH2 J22.10 J22.S1 J22.S2 Q1.2(SOURCE) Q3.2(SOURCE) Q4.2(SOURCE) R14.2 R16.2 R20.2 R21.2 R22.2 R34.2 R41.2 R43.2 R45.2 R55.2 R56.2 U3.2 U3.15 U6.3(COM_CATHODE) U11.B3 U11.C3 U11.D3 U12.2 U12.15 U13.3(COM_CATHODE) U14.2 U14.15 U15.3(COM_CATHODE) U16.1 U16.5 U16.10 U16.11 U16.15 U16.25 U16.35 U16.47 U16.51 U16.65 U17.4 U17.6 U17.7 U18.2 U19.2(VSS) U20.B1(GND) U21.9(VSS) U21.25 U22.6 U23.1 U23.3 U23.5 Y1.2 Y1.4
VBUS: C494.1 C530.1 L53.2 U18.1 U18.3
VBUS_CON: D1.2(C2) J10.A4 J10.A9 J10.B4(VBUS4) J10.B9 L53.1
VDD_CAN1_3V3: C2.1 L2.2 U3.5
VDD_CAN1_5V0: C1.1 C4.1 L1.2 R1.1 U3.3 U3.10
VDD_CAN2_3V3: C7.1 L4.2 U12.5
VDD_CAN2_5V0: C6.1 C9.1 L3.2 R6.1 U12.3 U12.10
VDD_CAN3_3V3: C12.1 L6.2 U14.5
VDD_CAN3_5V0: C11.1 C14.1 L5.2 R10.1 U14.3 U14.10
VDD_CON_GPS_3V3: D37.2 D37.9 FL6.3(OUTPUT) J22.8
VDD_CON_GPS_5V0: D26.2(C2) FL5.3(OUTPUT) J22.1
VDD_CON_I2C_5V0: D38.1 D38.10 FL8.3(OUTPUT) J13.1
VDD_CON_PWM: J12.2 J12.5 J12.8 J12.11 J12.14 J12.17 J12.20 J12.23 R50.1 R51.1
VDD_CON_UART_5V0: D27.2(C2) FL7.3(OUTPUT) J14.1
VDD_FT_1V8: C501.1 C511.1 L56.2 U16.49(VREGOUT)
VDD_SYS_1V8: C536.1 J1.27 Q3.1 R45.1 U22.1
VDD_SYS_3V3: C18.1 C19.1 C514.1 C515.1 C517.1 C528.1 C532.1 C534.1 C535.1 FL6.1 J1.31 J1.32 J1.33 J1.34 J1.35 J1.36 J1.37 J1.38 L2.1 L4.1 L6.1 R35.1 R36.1 R38.1 R39.1 R46.1 R47.1 U17.3 U17.11(VDDIO) U21.21 U21.23 U22.11
VDD_SYS_5V0: C16.1 C516.1 C518.1 C519.1 C526.1 C527.1 C531.1 C533.1 FL4.3(OUTPUT) FL5.1 FL7.1 FL8.1 J1.45 J1.46 J1.47 J1.48 L1.1 L3.1 L5.1 U11.A1 U11.A2(VIN2)
VDD_USB_3V3: C496.1 C497.1 C498.1 C499.1 C500.1 C506.1 C513.1 C529.1 L54.1 L55.1 R17.1 R26.1 R28.1 R29.1 R30.1 R31.1 R32.1 R33.1 R65.1 U16.20 U16.31 U16.42 U16.50 U16.56 U18.5(OUT) U19.6
ADC_IN6: C537.1 J2.26 R56.1 R57.2
ADC_IN7: J2.28 R65.2
BUZZER: D37.1 D37.10 J22.9 R40.2
CAN1_EN: R54.1 U3.6 U21.1
CAN1_ERR_N: U3.8 U21.10
CAN1_H: J4.2 R3.1 U3.13 U6.1
CAN1_L: J4.3 R4.1 U3.12 U6.2
CAN1_RX: J1.24 U3.4
CAN1_STB_N: U3.14 U21.2
CAN1_TX: J1.22 U3.1
CAN2_EN: R52.1 U12.6 U21.3
CAN2_ERR_N: U12.8 U21.11
CAN2_H: J8.2 R9.1 U12.13 U13.1
CAN2_L: J8.3 R7.1 U12.12 U13.2
CAN2_STB_N: U12.14 U21.4
CAN3_EN: R53.1 U14.6 U21.5
CAN3_ERR_N: U14.8 U21.12
CAN3_H: J9.2 R13.1 U14.13 U15.1
CAN3_L: J9.3 R11.1 U14.12 U15.2
CAN3_RX: U14.4 U22.7
CAN3_STB_N: U14.14 U21.6
CAN3_TX: U14.1 U22.8(YB3)
CAN_5V0: C520.1 C521.1 C522.1 C523.1 C524.1 FL9.1 FL10.1 FL11.1 U11.C2 U11.D1 U11.D2
CAN_PWR_EN: R14.1 R49.1 U11.B4 U21.8
CCM_CLKO2_FLEXIO1_IO27: J2.32 TP264.1(TP)
CCM_CLKO3_CAN3_TX: J2.36 U22.4
CCM_CLKO4_CAN3_RX: J2.38 U22.5
CON_CAN1_5V0: D34.2(C2) FL11.3(OUTPUT) J4.1
CON_CAN2_5V0: D33.2(C2) FL10.3(OUTPUT) J8.1
CON_CAN3_5V0: D32.2(C2) FL9.3(OUTPUT) J9.1
DEBUG_TCLK_SWCLK: J1.13 TP263.1(TP)
DEBUG_TDI: J1.19 TP260.1(TP)
DEBUG_TDO_TRACESWO: J1.17 TP261.1(TP)
DEBUG_TMS_SWDIO: J1.15 TP262.1(TP)
EECLK: R24.2 U16.62
EECS: R25.2 U16.63
EEDATA: R23.2 U16.61
FT_VCORE: C502.1 C503.1 C510.1 C512.1 L56.1 U16.12 U16.37 U16.64
FT_VPHY: C488.1 C507.1 L54.2 U16.4
FT_VPLL: C508.1 C509.1 L55.2 U16.9
GPIO00_UART5_TX: D7.5 D7.6(NC4) J2.3 J22.2
GPIO01_UART5_RX: D7.4 D7.7 J2.5 J22.3
GPIO02_UART5_CTS_B/I2C6_SDA: D7.1 D7.10 D38.2 D38.9 J2.7 J13.2 J22.5
GPIO03_UART5_RTS_B/I2C6_SCL: D7.2 D7.9 D38.4 D38.7 J2.9 J13.3 J22.4
GPIO04_CAN4_TX/TPM3_CH0: D35.1 D35.10 J2.13 J12.3
GPIO05_CAN4_RX/TPM4_CH0: D35.5 D35.6(NC4) J2.15 J12.12
GPIO06_TPM5_CH0: D36.2 D36.9 J2.19 J12.18
GPIO07_ARM_IO: D37.5 D37.6(NC4) J2.21 J22.6
GPIO08_UART7_TX: D10.1 D10.10 J2.25 J14.2
GPIO09_UART7_RX: D10.2 D10.9 J2.27 J14.3
GPIO10_UART7_CTS_B: D10.4 D10.7 J2.29 J14.4
GPIO11_UART7_RTS_B: D10.5 D10.6(NC4) J2.31 J14.5
GPIO12_SPI8_PCS0: J2.35 U17.14
GPIO13_SPI8_SIN: J2.37 U17.10 U17.15
GPIO14_SPI8_SOUT: J2.39 U17.9
GPIO15_SPI8_SCK: J2.41 U17.8
GPIO17_IMU_INT1: J2.45 U17.16
GPIO18_IMU_INT2: J2.47 U17.12
GPIO20_TPM3_CH1: D35.2 D35.9 J2.4 J12.6
GPIO21_TPM4_CH1: D36.1 D36.10 J2.6 J12.15
GPIO22_CAN5_TX/TPM5_CH1: D36.4 D36.7 J2.14 J12.21
GPIO23_CAN5_RX/TPM6_CH1: D36.5 D36.6(NC4) J2.16 J12.24 S1.2
GPIO24_TPM3_CH3: D35.4 D35.7 J2.8 J12.9
GPIO25_CAN2_TX: J2.20 U12.1
GPIO26_SPI8_PCS1: J2.10 U17.5
GPIO27_CAN2_RX: J2.22 U12.4
I2C4_SCL: J1.18 R39.2 U21.19
I2C4_SDA: J1.16 R38.2 U21.20
I3C1_SCL: J1.6 TP257.1(TP)
I3C1_SDA: J1.4 TP256.1(TP)
I3C2A_SCL: J1.12 TP259.1(TP)
I3C2A_SDA: J1.10 TP258.1(TP)
IO_EXT_RST_N: R36.2 R48.2 U21.24
IO_WAKE_INT: J1.23 R35.2 U21.22
LED_B: R62.1 U21.15
LED_G: R64.1 U21.14
LED_R: R63.1 U21.13
PWREN: TP251.1(TP) U16.60
RX1_LED: D2.C(CATHODE) U16.29
RX2_LED: D4.C(CATHODE) U16.54
SAI2_RX_DATA0: J2.42 TP265.1(TP)
SAI2_TX_BCLK: J2.46 TP267.1(TP)
SAI2_TX_DATA0: J2.48 TP268.1(TP)
SAI2_TX_SYNC: J2.44 TP266.1(TP)
SUSPEND: TP252.1(TP) U16.36
SW_LED_OUT: D37.4 D37.7 J22.7 U21.17
TX1_LED: D3.C(CATHODE) U16.30
TX2_LED: D5.C(CATHODE) U16.55
UART1_RXD: J1.5 R58.2
UART1_TXD/BT_MODE0: J1.3 R59.2
UART2_RXD: J1.9 R60.2
UART2_TXD/BT_MODE1: J1.7 R61.2
USB_CON_DM: J10.A7 J10.B7 U20.A1
USB_CON_DP: J10.A6 J10.B6 U20.A2
USB_DM: U16.7 U20.C1
USB_DP: U16.8 U20.C2
N20053038: R1.2 U3.9(WAKE)
N20053813: C5.1 R3.2 R4.2 R5.2
N20053961: R5.1 U3.11
N20058723: R6.2 U12.9(WAKE)
N20058772: R8.1 U12.11
N20058865: C10.1 R7.2 R8.2 R9.2
N20059561: R10.2 U14.9(WAKE)
N20059610: R12.1 U14.11
N20059703: C15.1 R11.2 R12.2 R13.2
N20060644: C17.1 U11.D4
N20061004: R43.1 U11.A3
N20071567: R58.1 U16.16
N20071574: R59.1 U16.17
N20071618: R60.1 U16.38
N20071624: R61.1 U16.39
N20072154: R16.1 U16.13
N20072176: R17.2 U16.14
N20077267: R20.1 U16.6
N20078741: C505.1 U16.3 Y1.3
N20078963: C504.1 U16.2 Y1.1
N20082649: J10.B5 R22.1
N20082656: J10.A5 R21.1
N20087819: R23.1 R27.2 U19.3
N20087854: R24.1 R28.2 U19.4
N20087884: R25.1 R29.2 U19.5
N20087948: R26.2 R27.1 U19.1
N20088750: D2.A R30.2
N20088753: D3.A R31.2
N20089288: D4.A R32.2
N20089290: D5.A R33.2
N20094822: R34.1 U21.18
N20099573: D31.2(C2) FL4.1 R50.2
N20106351: Q1.1 R41.1 S1.1(NC)
N20106801: Q1.3 R40.1
N20163544: Q4.3 R46.2 R48.1
N20163589: Q3.3 Q4.1 R47.2
N20172629: D39.A R49.2
N20173940: D41.A R52.2
N20174182: D42.A R53.2
N20174333: D43.A R54.2
N20177887: R55.1 U22.12
N20178558: TP253.1(TP) U22.2
N20178563: TP245.1(TP) U22.3
N20178590: TP254.1(TP) U22.10
N20178595: TP255.1(TP) U22.9
N20178957: R51.2 R57.1
N20182715: R62.2 U23.2
N20182769: R63.2 U23.4
N20182794: R64.2 U23.6
N20183576: TP269.1(TP) U17.1
N20183581: TP270.1(TP) U17.13

Pads without a net: D38 5 6; J10 A2 A3 A8 A10 A11 B2 B3 B8 B10 B11; U3 7; U11 A4 B1 B2 C1 C4; U12 7; U14 7; U16 18 19 21 22 23 24 26 27 28 32 33 34 40 41 43 44 45 46 48 52 53 57 58 59; U17 2; U18 4; U21 7 16

## Via types
v1: diameter 0.457, hole 0.203, TOP to BOTTOM, 412 vias
v2: diameter 0.457, hole 0.206, TOP to BOTTOM, 231 vias

## Routing (per net, layer and track width the routed paths; a pad name or vN(x,y) marks a point on that pad's centre or on a via; arc(x,y) is an arc through that point)
GND: length 323.1
  TOP w0.2: 30.15,62 U20.B1
  TOP w0.3: v1(30,50) U15.3 v1(30,51.5) ; v1(5.75,9.65) FL4.2 v1(5.75,11.25) ; C5.2 v1(27.49,32.39) ; v1(4.05,20.45) FL8.2 v1(4.05,18.85) ; v1(5.42,14.88) J13.4 v1(7.92,14.88) ; C10.2 v1(27.49,42.89) ; v1(13.75,43.05) U21.9 13.75,40.5 U21.25 ; 38.2,66.95 J10.SH4 37.35,66.95 ; 38.2,66.95 v1(38.2,67.9) ; 38.2,66.95 v1(38.2,65.95) ; U14.2 23.55,51.05 23.75,50.85 U14.15 ; v1(7.85,33.9) D27.1 v1(7.85,35.3) FL7.2 v1(7.85,36.95) ; v2(12.3,29.27) 12.58,28.99 U17.4 ; U16.47 v1(5.65,62.25) ; v1(31.45,10.65) D26.1 v1(31.45,9.1) FL5.2 31.45,7.55 v1(31.7,7.3) 31.96,7.04 C516.2 v1(31.96,5.91) ; U16.1 15.75,61.75 15.85,61.65 v1(15.85,60.95) ; v1(32.55,13) D7.8 D7.3 v1(30.45,13) ; Q3.2 15.03,33.62 v2(14.75,33.34) ; D33.1 v1(31.4,37) FL10.2 v1(31.4,35.3) 31.9,34.8 ; D34.1 v1(31.4,26.5) FL11.2 v1(31.4,24.8) 31.9,24.3 ; v1(30,39.5) U13.3 v1(30,41) ; v1(3.1,21.1) C519.2 v1(3.79,21.85) ; 27.5,53.7 27.49,53.69 C15.2 ; 30.15,61.8 30.15,62 ; v1(24.5,13.35) D36.8 D36.3 v1(24.5,11.2) ; 31.9,24.3 C522.2 ; 31.9,24.3 v1(31.4,23.8) ; 31.9,34.8 v1(31.4,34.3) ; 31.9,34.8 C521.2 ; U16.11 v1(14.55,66.75) ; v1(30.25,19.25) FL6.2 v1(28.45,19.25) ; 37.35,66.95 v1(37.35,67.9) ; 37.35,66.95 v1(37.35,65.95) ; v2(37.1,22.98) v2(38.1,22.98) ; U16.35 v1(7.45,68.25) ; R21.2 v1(28.35,60.85) ; v1(8.15,9.7) D31.1 v1(8.15,11.25) ; v1(5.05,17.15) D38.8 D38.3 v1(2.95,17.15) ; U17.6 13.3,29.99 13.2,30.09 13.2,30.49 ; U12.2 23.5,40.55 23.75,40.3 U12.15 ; v1(30,29) U6.3 v1(30,30.5) ; R41.2 v1(23.8,20.2) ; v1(14.45,68.95) 14.65,68.75 U16.15 ; v1(14.5,13.3) D35.8 D35.3 v1(14.5,11.2) ; 13.2,30.49 U17.7 ; 13.2,30.49 v1(13.2,31.1) ; C505.2 19.58,59.96 v2(19.58,59.53) ; v1(29.55,64.65) D1.1 v1(29.55,63.25) ; D32.1 v1(31.4,47.5) FL9.2 v1(31.4,45.8) 31.9,45.3 ; C520.2 31.9,45.3 ; 31.9,45.3 v1(31.4,44.8) ; U3.15 23.75,29.75 23.45,30.05 U3.2 ; v1(30.4,17.95) 31.05,17.95 D37.3 31.15,17.95 31.85,17.95 D37.8 31.95,17.95 v1(32.65,17.95) ; v1(5.38,24.88) J14.6 v1(7.97,24.88) ; R56.2 v1(19.35,14.55) ; U16.25 v1(10.75,70.85) ; U16.51 v1(8.25,62.15) ; v1(2.9,28) D10.3 D10.8 v1(5.05,28) ; Q1.2 v1(27.22,17.17) ; v2(16.04,57.86) 16.82,58.64 v2(16.82,59.17) ; R22.2 v1(28.35,59.9) ; v1(30.05,21.75) 30.04,21.76 C517.2 28.66,21.76 v1(28.65,21.75) ; R34.2 v1(8.5,39) ; C537.2 v1(19.35,13.6) ; Q4.2 v1(17,34.6)
  TOP w0.5: v1(32.77,52.62) J9.4 v1(35.23,52.62) ; v1(32.48,21.12) J22.10 v1(35.23,21.12) ; v1(32.77,42.12) J8.4 v1(35.23,42.12) ; v1(7.95,52.85) 8.25,52.55 U19.2 ; v1(30.15,61.65) 30.15,61.8 ; v1(32.77,31.62) J4.4 v1(35.23,31.62) ; U23.3 v1(2.5,55.5) ; U23.1 v1(3.35,53.85) ; C494.2 v1(27.6,63.8) ; C530.2 v1(28.34,67.46) ; U23.5 v1(1.65,53.85)
  L2_GND1 w0.305: J10.SH2 32.19,67.67 ; J10.SH2 32.19,66.23 ; J10.SH2 31.18,66.95 ; J10.SH2 33.2,66.95 ; 12.34,3.88 J12.4 ; J12.4 12.34,5.49 ; J12.4 13.96,3.88 ; J12.4 13.96,5.49 ; J12.16 24.12,3.88 ; J12.16 24.12,5.49 ; J12.16 22.5,5.49 ; J12.16 22.5,3.88 ; 14.88,5.49 J12.7 ; J12.7 16.5,3.88 ; J12.7 14.88,3.88 ; J12.7 16.5,5.49 ; J12.10 19.04,3.88 ; J12.10 17.42,3.88 ; J12.10 19.04,5.49 ; J12.10 17.42,5.49 ; 32.55,65.95 J10.B1 32.55,65.05 ; 31.18,57.95 J10.SH1 ; J10.SH1 33.2,57.95 ; J10.SH1 32.19,57.23 ; J10.SH1 32.19,58.67 ; J12.1 11.42,5.49 ; J12.1 9.8,3.88 ; J12.1 11.42,3.88 ; J12.1 9.8,5.49 ; J12.13 21.58,3.88 ; J12.13 19.96,5.49 ; J12.13 21.58,5.49 ; J12.13 19.96,3.88 ; 25.04,3.88 J12.19 ; J12.19 26.66,5.49 ; J12.19 25.04,5.49 ; J12.19 26.66,3.88 ; J10.SH4 37.8,67.67 ; J10.SH4 36.68,66.95 ; J10.SH4 37.8,66.23 ; 37.8,57.23 J10.SH3 ; J10.SH3 36.68,57.95 ; J10.SH3 37.8,58.67 ; 27.58,3.88 J12.22 ; J12.22 29.2,3.88 ; J12.22 27.58,5.49 ; J12.22 29.2,5.49 ; 32.55,59.85 J10.B12 32.55,58.95
  L3_SIG1 w0.305: 12.34,3.88 J12.4 13.96,3.88 ; J10.SH2 33.2,66.95 ; J10.SH2 32.19,66.23 ; J10.SH2 31.18,66.95 ; J10.SH2 32.19,67.67 ; 37.8,57.23 J10.SH3 ; J10.SH3 36.68,57.95 ; J10.SH3 37.8,58.67 ; 26.66,3.88 J12.19 25.04,3.88 ; J10.SH4 37.8,67.67 ; J10.SH4 37.8,66.23 ; J10.SH4 36.68,66.95 ; 19.96,3.88 J12.13 21.58,3.88 ; 24.12,3.88 J12.16 22.5,3.88 ; 11.42,3.88 J12.1 9.8,3.88 ; 19.04,3.88 J12.10 17.42,3.88 ; 16.5,3.88 J12.7 14.88,3.88 ; J10.SH1 32.19,58.67 ; J10.SH1 33.2,57.95 ; J10.SH1 32.19,57.23 ; 27.58,3.88 J12.22 29.2,3.88
  L4_SIG2 w0.305: 27.58,5.49 J12.22 ; J12.22 29.2,5.49 ; J12.22 29.2,3.88 ; J12.22 27.58,3.88 ; 19.96,3.88 J12.13 ; J12.13 21.58,5.49 ; J12.13 19.96,5.49 ; J12.13 21.58,3.88 ; J12.16 24.12,5.49 ; J12.16 22.5,5.49 ; J12.16 22.5,3.88 ; J12.16 24.12,3.88 ; 32.55,59.85 J10.B12 32.55,58.95 ; 12.34,3.88 J12.4 ; J12.4 13.96,3.88 ; J12.4 12.34,5.49 ; J12.4 13.96,5.49 ; 37.8,66.23 J10.SH4 ; J10.SH4 36.68,66.95 ; J10.SH4 37.8,67.67 ; 14.88,3.88 J12.7 ; J12.7 16.5,5.49 ; J12.7 14.88,5.49 ; J12.7 16.5,3.88 ; J10.SH2 32.19,67.67 ; J10.SH2 33.2,66.95 ; J10.SH2 31.18,66.95 ; J10.SH2 32.19,66.23 ; J12.10 19.04,5.49 ; J12.10 19.04,3.88 ; J12.10 17.42,3.88 ; J12.10 17.42,5.49 ; J12.1 11.42,5.49 ; J12.1 9.8,5.49 ; J12.1 11.42,3.88 ; J12.1 9.8,3.88 ; J10.SH1 32.19,58.67 ; J10.SH1 32.19,57.23 ; J10.SH1 31.18,57.95 ; J10.SH1 33.2,57.95 ; J12.19 26.66,3.88 ; J12.19 26.66,5.49 ; J12.19 25.04,5.49 ; J12.19 25.04,3.88 ; J10.SH3 37.8,58.67 ; J10.SH3 36.68,57.95 ; J10.SH3 37.8,57.23 ; 32.55,65.05 J10.B1 32.55,65.95
  L5_GND2 w0.305: 9.8,3.88 J12.1 ; J12.1 11.42,3.88 ; J12.1 9.8,5.49 ; J12.1 11.42,5.49 ; 31.18,57.95 J10.SH1 ; J10.SH1 32.19,58.67 ; J10.SH1 33.2,57.95 ; J10.SH1 32.19,57.23 ; J12.13 21.58,3.88 ; J12.13 19.96,3.88 ; J12.13 21.58,5.49 ; J12.13 19.96,5.49 ; 32.55,59.85 J10.B12 32.55,58.95 ; 12.34,3.88 J12.4 ; J12.4 13.96,3.88 ; J12.4 13.96,5.49 ; J12.4 12.34,5.49 ; J12.19 26.66,3.88 ; J12.19 25.04,5.49 ; J12.19 25.04,3.88 ; J12.19 26.66,5.49 ; 37.8,66.23 J10.SH4 ; J10.SH4 37.8,67.67 ; J10.SH4 36.68,66.95 ; J10.SH3 37.8,58.67 ; J10.SH3 37.8,57.23 ; J10.SH3 36.68,57.95 ; 17.42,5.49 J12.10 ; J12.10 19.04,3.88 ; J12.10 19.04,5.49 ; J12.10 17.42,3.88 ; 32.55,65.05 J10.B1 32.55,65.95 ; 14.88,3.88 J12.7 ; J12.7 16.5,3.88 ; J12.7 16.5,5.49 ; J12.7 14.88,5.49 ; 22.5,3.88 J12.16 ; J12.16 24.12,3.88 ; J12.16 22.5,5.49 ; J12.16 24.12,5.49 ; J10.SH2 32.19,67.67 ; J10.SH2 32.19,66.23 ; J10.SH2 33.2,66.95 ; J10.SH2 31.18,66.95 ; J12.22 29.2,3.88 ; J12.22 29.2,5.49 ; J12.22 27.58,3.88 ; J12.22 27.58,5.49
  BOTTOM w0.2: J2.49 v1(15.55,55.35) ; J2.24 v1(10.35,51.1) ; J2.30 v1(11.55,51.1) ; J2.12 v1(7.95,52.85) ; J2.34 v1(12.35,51.1) ; J1.14 v1(26.9,73.6) ; J1.21 v1(25.3,70.9) ; J1.20 v1(25.7,73.6) ; J2.18 v1(9.15,52.85) ; J1.11 v1(27.3,69.4) ; v1(13.1,52.65) 13.2,52.65 13.55,52.3 J2.40 ; J2.23 v1(10.35,53.75) ; J2.11 v1(7.95,53.65) ; J2.43 v1(14.35,55.35) ; J1.8 v1(28.1,73.6) ; J2.33 v1(12.35,55.35) ; J2.SH3 v1(16.02,53.9) ; J2.17 v1(9.15,53.65)
  BOTTOM w0.3: v1(38.25,59) 38.25,58.25 37.95,57.95 J10.SH3 37.65,57.95 37.4,58.2 v1(37.4,59) ; R16.2 v2(13,67.5) ; v1(32.55,67.95) 32.55,67.1 32.4,66.95 J10.SH2 32,66.95 31.75,67.2 v1(31.75,67.95) ; C536.2 v1(13.15,46.75) ; v1(32.6,57.05) 32.6,57.8 32.45,57.95 J10.SH1 31.9,57.95 31.8,57.85 v1(31.8,57.05) ; 37.35,66.95 v1(37.35,65.95) ; 37.35,66.95 J10.SH4 38.2,66.95 ; 37.35,66.95 v1(37.35,67.9) ; v2(13,63.5) 13.71,62.79 R20.2 ; R14.2 v1(28.25,57.65) ; C17.2 v1(28.25,56.65) ; 38.2,66.95 v1(38.2,65.95) ; 38.2,66.95 v1(38.2,67.9) ; U22.6 v1(14.75,51.15)
  vias: v1(1,29.5) v1(1,27.5) v1(1,25.5) v1(1,23.5) v1(1,21.5) v1(1,19.5) v1(1,17.5) v1(1,15.5) v1(1,13.5) v1(1,11.5) v1(1.25,74) v1(1.3,47.7) v1(2,30.5) v1(2.25,75) v1(2.3,47.1) v1(3.8,59.7) v1(3.75,30.5) v1(5.15,53.8) v1(5.15,52.7) v1(5.55,48.3) v1(6.5,75) v1(6.8,38.75) v1(6.8,37.9) v1(8.5,75) v1(8.5,18.25) v1(8.5,1) v1(8.95,16.7) v1(10.5,75) v1(10.5,1) v1(11.9,9.7) v1(12.5,75) v1(12.5,19.5) v1(12.5,1) v1(13.5,18.5) v1(14.05,26.05) v1(14.4,9.7) v1(14.5,75) v1(14.5,1) v1(15,19.5) v1(15.3,42.1) v1(15.65,59.65) v1(16.2,56.55) v1(16.45,60.3) v1(16.5,75) v1(16.5,1) v1(16.7,52) v1(16.7,51.2) v1(16.95,9.75) v1(17,18.5) v1(17.4,56.55) v1(17.9,61.7) v1(18,18.5) v1(18.2,26.65) v1(18.4,56.7) v1(18.45,24.1) v1(18.5,75) v1(18.5,1) v1(18.55,28.05) v1(19.05,57.3) v1(19.3,73.6) v1(19.3,72.05) v1(19.3,69.4) v1(19.65,57.95) v1(19.75,45.75) v1(20.3,62) v1(20.3,58.6) v1(20.5,75) v1(20.5,19.5) v1(20.5,1) v1(21.05,61.7) v1(21.05,60.85) v1(21.3,73.6) v1(21.9,61.7) v1(21.9,60.85) v1(22,65.85) v1(22.05,9.7) v1(22.25,45.95) v1(22.3,66.65) v1(22.5,75) v1(22.5,1) v1(22.8,43) v1(22.75,19.75) v1(22.9,16.4) v1(23,65.85) v1(23.25,66.65) v1(24,75) v1(24.1,70.9) v1(24.2,16.4) v1(24.5,1) v1(24.6,9.7) v1(24.95,66.35) v1(25.25,19.5) v1(25.65,66.35) v1(25.9,54.55) v1(25.9,53.7) v1(26.3,43.65) v1(26.5,1) v1(26.75,54.55) v1(26.75,53.7) v1(26.8,45.5) v1(27.1,9.7) v1(27.6,61.1) v1(28.5,1) v1(29,75) v1(29.25,14.6) v1(29.35,44.25) v1(29.6,9.3) v1(29.8,73.6) v1(29.8,72.1) v1(29.8,70.9) v1(29.8,69.45) v1(30.75,67) v1(31,75) v1(31,73.5) v1(31,72) v1(31,70.5) v1(31,68.75) v1(31.45,65.85) v1(31.45,15.9) v1(31.55,59) v1(32.25,65.85) v1(32.35,59) v1(38,64.5) v1(38,62.5) v1(38,60.5) v1(38,53) v1(38,50.5) v1(38,48.5) v1(38,42.5) v1(38,40) v1(38,38) v1(38,31.5) v1(38,29.5) v1(38,27.5) v1(38,21.5) v1(38,19.5) v1(38,17.5) v1(38,15.5) v1(38,13.5) v1(38,11.5) v1(38,9.5) v2(3.8,58.85) v2(4.09,67.85) v2(4.09,64.75) v2(5.2,58.85) v2(5.69,59.7) v2(6,52.7) v2(7.75,72.21) v2(7.75,58.64) v2(9,67.5) v2(9,66.5) v2(9,65.5) v2(9,64.5) v2(9,63.5) v2(9.03,32.98) v2(9.03,23.02) v2(9.03,20.48) v2(9.03,13.03) v2(10,67.5) v2(10,66.5) v2(10,65.5) v2(10,64.5) v2(10,63.5) v2(10.03,32.98) v2(10.03,23.02) v2(10.03,20.48) v2(10.03,13.03) v2(10.75,58.64) v2(11,67.5) v2(11,66.5) v2(11,65.5) v2(11,64.5) v2(11,63.5) v2(11.03,32.98) v2(11.03,23.02) v2(11.03,20.48) v2(11.03,13.03) v2(12,67.5) v2(12,66.5) v2(12,65.5) v2(12,64.5) v2(12,63.5) v2(12.75,41) v2(12.75,39.5) v2(12.75,35.49) v2(13,66.5) v2(13,65.5) v2(13,64.5) v2(13.25,72.21) v2(14.25,41) v2(14.25,39.5) v2(14.75,58.64) v2(14.75,46.74) v2(14.75,35.49) v2(15.75,46.74) v2(16.7,66.51) v2(16.7,64.01) v2(17.46,28.73) v2(17.91,67.9) v2(17.9,66.86) v2(17.9,64.11) v2(19.3,70.9) v2(19.6,51.2) v2(19.6,40.7) v2(19.6,30.2) v2(20.55,51.2) v2(20.55,48.09) v2(20.55,40.7) v2(20.55,37.59) v2(20.55,30.2) v2(20.55,27.09) v2(21.3,72.1) v2(21.3,70.9) v2(21.3,69.4) v2(23.25,51.5) v2(23.25,50.5) v2(23.25,49) v2(23.25,48) v2(23.25,41) v2(23.25,40) v2(23.25,38.5) v2(23.25,37.5) v2(23.25,30.5) v2(23.25,29.5) v2(23.25,28) v2(23.25,27) v2(24.1,73.6) v2(24.1,72.1) v2(24.25,51.5) v2(24.25,50.5) v2(24.25,49) v2(24.25,48) v2(24.25,41) v2(24.25,40) v2(24.25,38.5) v2(24.25,37.5) v2(24.25,30.5) v2(24.25,29.5) v2(24.25,28) v2(24.25,27) v2(36.1,22.98) v2(36.1,8.03) v2(36.2,54.48) v2(36.25,47) v2(36.2,43.98) v2(36.2,36.52) v2(36.2,33.48) v2(36.2,26.02) v2(37.1,8.03) v2(37.2,54.48) v2(37.25,47) v2(37.2,43.98) v2(37.2,36.52) v2(37.2,33.48) v2(37.2,26.02) v2(38.02,56.25) v2(38.02,45.5) v2(38.02,35) v2(38.02,24.5) v2(38.1,8.03) v2(38.2,54.48) v2(38.25,47) v2(38.2,43.98) v2(38.2,36.52) v2(38.2,33.48) v2(38.2,26.02)
VBUS: length 5.1
  TOP w0.3: U18.3 24.35,66.05 v1(24.1,66.3)
  BOTTOM w0.3: v1(24.1,66.3) 24.55,65.85 27.01,65.85 v2(27.6,66.44)
VBUS_CON: length 3.2
  TOP w0.3: J10.A4 v1(31.2,61.2)
  L3_SIG1 w0.305: 32.55,60.8 J10.B9 32.55,61.7 ; 32.55,64.1 J10.B4 32.55,63.2
  vias: v1(31.1,64.25)
VDD_CAN1_3V3: length 2.8
  TOP w0.3: U3.5 22.24,28.11 C2.1
  TOP w0.5: L2.2 19.72,28.11 C2.1
VDD_CAN1_5V0: length 12.2
  TOP w0.3: C1.1 20.52,29.19 v2(20.55,29.23) 21.02,29.23 21.2,29.4 U3.3 ; R1.1 26.75,27.3 v1(26.2,27.85) 25.95,28.1 U3.10
  TOP w0.5: C1.1 18.67,29.19 L1.2
  BOTTOM w0.5: v1(26.2,27.85) 25.3,28.75 22.75,28.75 22.05,29.45 20.77,29.45 v2(20.55,29.23)
VDD_CAN2_3V3: length 2.8
  TOP w0.3: U12.5 22.24,38.61 C7.1
  TOP w0.5: C7.1 19.72,38.61 L4.2
VDD_CAN2_5V0: length 12.2
  TOP w0.3: R6.1 26.75,37.8 v1(26.2,38.35) 25.95,38.6 U12.10 ; U12.3 21.2,39.9 21.02,39.73 v2(20.55,39.73) 20.52,39.69 C6.1
  TOP w0.5: L3.2 18.67,39.69 C6.1
  BOTTOM w0.5: v2(20.55,39.73) 20.77,39.95 22.05,39.95 22.75,39.25 25.3,39.25 v1(26.2,38.35)
VDD_CAN3_3V3: length 2.8
  TOP w0.3: C12.1 22.24,49.11 U14.5
  TOP w0.5: L6.2 19.72,49.11 C12.1
VDD_CAN3_5V0: length 13
  TOP w0.3: U14.3 21.2,50.4 21.02,50.23 v2(20.55,50.23) 20.52,50.19 C11.1 ; U14.10 25.95,49.1 v1(26.2,48.85) 26.75,48.3 R10.1
  TOP w0.5: C11.1 18.67,50.19 L5.2
  BOTTOM w0.5: v2(20.55,50.23) 20.55,49.35 20.8,49.1 22.05,49.1 22.7,49.75 25.3,49.75 v1(26.2,48.85)
VDD_CON_PWM: length 43.6
  TOP w0.3: J12.14 19.55,8.45 R51.1 ; R50.1 v1(6.69,8.24) ; R50.1 v1(7.35,7.5) ; R50.1 v1(8.06,8.24)
  L3_SIG1 w0.305: 17.42,6.42 J12.11 ; J12.11 19.04,6.42 ; J12.11 19.04,8.03 ; J12.11 17.42,8.03 ; 27.58,6.42 J12.23 ; J12.23 27.58,8.03 ; J12.23 29.2,6.42 ; J12.23 29.2,8.03 ; J12.8 16.5,6.42 ; J12.8 14.88,8.03 ; J12.8 16.5,8.03 ; J12.8 14.88,6.42 ; J12.20 26.66,8.03 ; J12.20 25.04,8.03 ; J12.20 26.66,6.42 ; J12.20 25.04,6.42 ; 22.5,8.03 J12.17 ; J12.17 24.12,8.03 ; J12.17 22.5,6.42 ; J12.17 24.12,6.42 ; 9.8,6.42 J12.2 ; J12.2 9.8,8.03 ; J12.2 11.42,8.03 ; J12.2 11.42,6.42 ; 12.34,6.42 J12.5 ; J12.5 13.96,8.03 ; J12.5 12.34,8.03 ; J12.5 13.96,6.42 ; J12.14 21.58,6.42 ; J12.14 21.58,8.03 ; J12.14 19.96,8.03 ; J12.14 19.96,6.42
VDD_SYS_1V8: length 52.9
  TOP w0.3: Q3.1 15.03,34.08 v2(14.75,34.36)
  TOP w0.5: 17.55,50.45 15.55,50.45 13.75,48.65 v2(13.75,47.76)
  TOP w0.6: v1(20.85,57.2) v1(20.2,56.55) 17.55,53.9 17.55,49.35 18.05,48.85 v1(18.05,48.25) v1(18.05,47.25)
  L4_SIG2 w0.6: v1(24.1,68.55) 24.1,67.85 24.6,67.35 25.9,67.35 26.55,66.7 26.55,65.05 24.1,62.6 24.1,59.7 21.6,57.2 v1(20.85,57.2) v1(20.2,56.55)
  L4_SIG2 w0.8: v1(24.1,69.4) v1(24.1,68.55)
  BOTTOM w0.3: U22.1 13.95,48.9 13.75,48.7 v2(13.75,47.76)
  BOTTOM w0.6: v2(14.75,34.36) 15.71,34.36 16.7,35.35 16.7,45.9 v1(18.05,47.25) v1(18.05,48.25)
VDD_SYS_3V3: length 10.4
  TOP w0.3: v2(12.3,28.25) 12.86,28.49 U17.3 ; U21.23 14.25,37.01 v2(14.75,36.51) ; v1(30.05,20.75) 30.04,20.74 C517.1 28.66,20.74 v1(28.65,20.75) ; U17.11 16.84,29.49 v2(17.46,29.75) ; v2(12.75,36.51) 13.25,37.01 U21.21
  TOP w0.5: C517.1 FL6.1
  BOTTOM w0.3: v2(15.75,47.76) 15.75,48.75 15.55,48.95 U22.11
  vias: v1(22.3,73.6) v1(22.3,72.1) v1(22.3,69.4) v1(23.1,70.9) v1(23.1,69.4) v2(10.75,35.49) v2(11.75,35.49) v2(13.75,35.49) v2(15.49,32.75) v2(15.75,35.49) v2(17.7,33.24) v2(19.5,47.77) v2(19.5,47.05) v2(19.5,37.27) v2(19.5,36.55) v2(19.5,26.77) v2(19.5,26.05) v2(22.3,70.9) v2(23.1,73.6) v2(23.1,72.1)
VDD_SYS_5V0: length 1.4
  TOP w0.3: v1(5.5,21.1) C519.1 v1(4.81,21.85)
  vias: v1(4.8,12.05) v1(4.8,11.25) v1(9.15,38.05) v1(9.15,37.2) v1(20.3,73.6) v1(21.05,59.7) v1(21.05,58.85) v1(21.9,59.7) v1(21.9,58.85) v1(30.4,7.1) v1(30.4,6.25) v2(18.5,52.2) v2(18.5,51.5) v2(18.5,41.7) v2(18.5,41) v2(18.5,31.2) v2(18.5,30.5) v2(20.3,72.1) v2(20.3,70.9) v2(20.3,69.4)
VDD_USB_3V3: length 19.7
  TOP w0.3: U16.31 v2(7.75,71.19) ; v1(1.55,72.7) 1,73.25 R30.1 ; R33.1 v1(1,58.05) ; v2(11.7,49.34) 6.01,49.34 5.7,49.65 v1(5.7,51.15) R26.1 ; v2(7.75,59.66) U16.50 ; v2(10.75,59.66) U16.56 ; R31.1 v1(1,66) R32.1 ; U16.42 v2(5.11,64.75) ; U16.20 v2(13.25,71.19)
  TOP w0.5: C513.1 6.71,53.76 7.3,54.35 U19.6
  vias: v1(20.1,64.3) v1(20.1,63.45) v1(20.95,64.3) v1(20.95,63.45) v2(6,53.8) v2(8.75,58.51) v2(9.75,58.51) v2(17.91,68.9)
ADC_IN6: length 43.6
  TOP w0.145: R57.2 C537.1 R56.1 v1(17.59,24.09)
  L4_SIG2 w0.135: v1(15.6,44.1) 16.05,44.1 16.7,43.45 16.7,39.35 17.3,38.75 17.3,35.35 17.6,35.05 17.6,33.85 17.25,33.5 17.25,32.2 16.3,31.25 16.3,25.38 v1(17.59,24.09)
  BOTTOM w0.1: 10.75,50.9 10.75,51.4
  BOTTOM w0.145: v1(15.6,44.1) 13.75,45.95 13.25,45.95 12.53,46.67 11.79,48.46 10.75,49.5 10.75,50.9 ; 10.75,51.4 J2.26
ADC_IN7: length 1.8
  BOTTOM w0.1: 11.15,51.06 11.15,51.3
  BOTTOM w0.145: 11.15,51.3 J2.28 ; R65.2 11.15,50.91 11.15,51.06
BUZZER: length 5.1
  TOP w0.145: R40.2 30.75,19.25 31,19 D37.1 D37.10 32.35,19 33,19.65 33.68,19.65 J22.9
CAN1_EN: length 30.9
  TOP w0.145: v2(33.99,24.5) 32.69,23.2 29.35,23.2 27.6,24.95 22.55,24.95 21.4,26.1 v1(21.4,27.45) U3.6 ; v1(20.6,31.25) 18.25,33.6 18.25,36.8 16.05,39 U21.1
  L4_SIG2 w0.135: v1(21.4,27.45) 20.95,27.9 20.95,30.9 v1(20.6,31.25)
